# Altium PCB BUNE.PcbDoc (part 2 of 2)
Units mm, origin at the board's own origin, x right, y up, seen from the top; angles counter-clockwise.
Board outline 148 x 105 mm, 2 copper layers (Top Layer, Bottom Layer); 139 components, 96 nets, 476 pads, 94 vias.
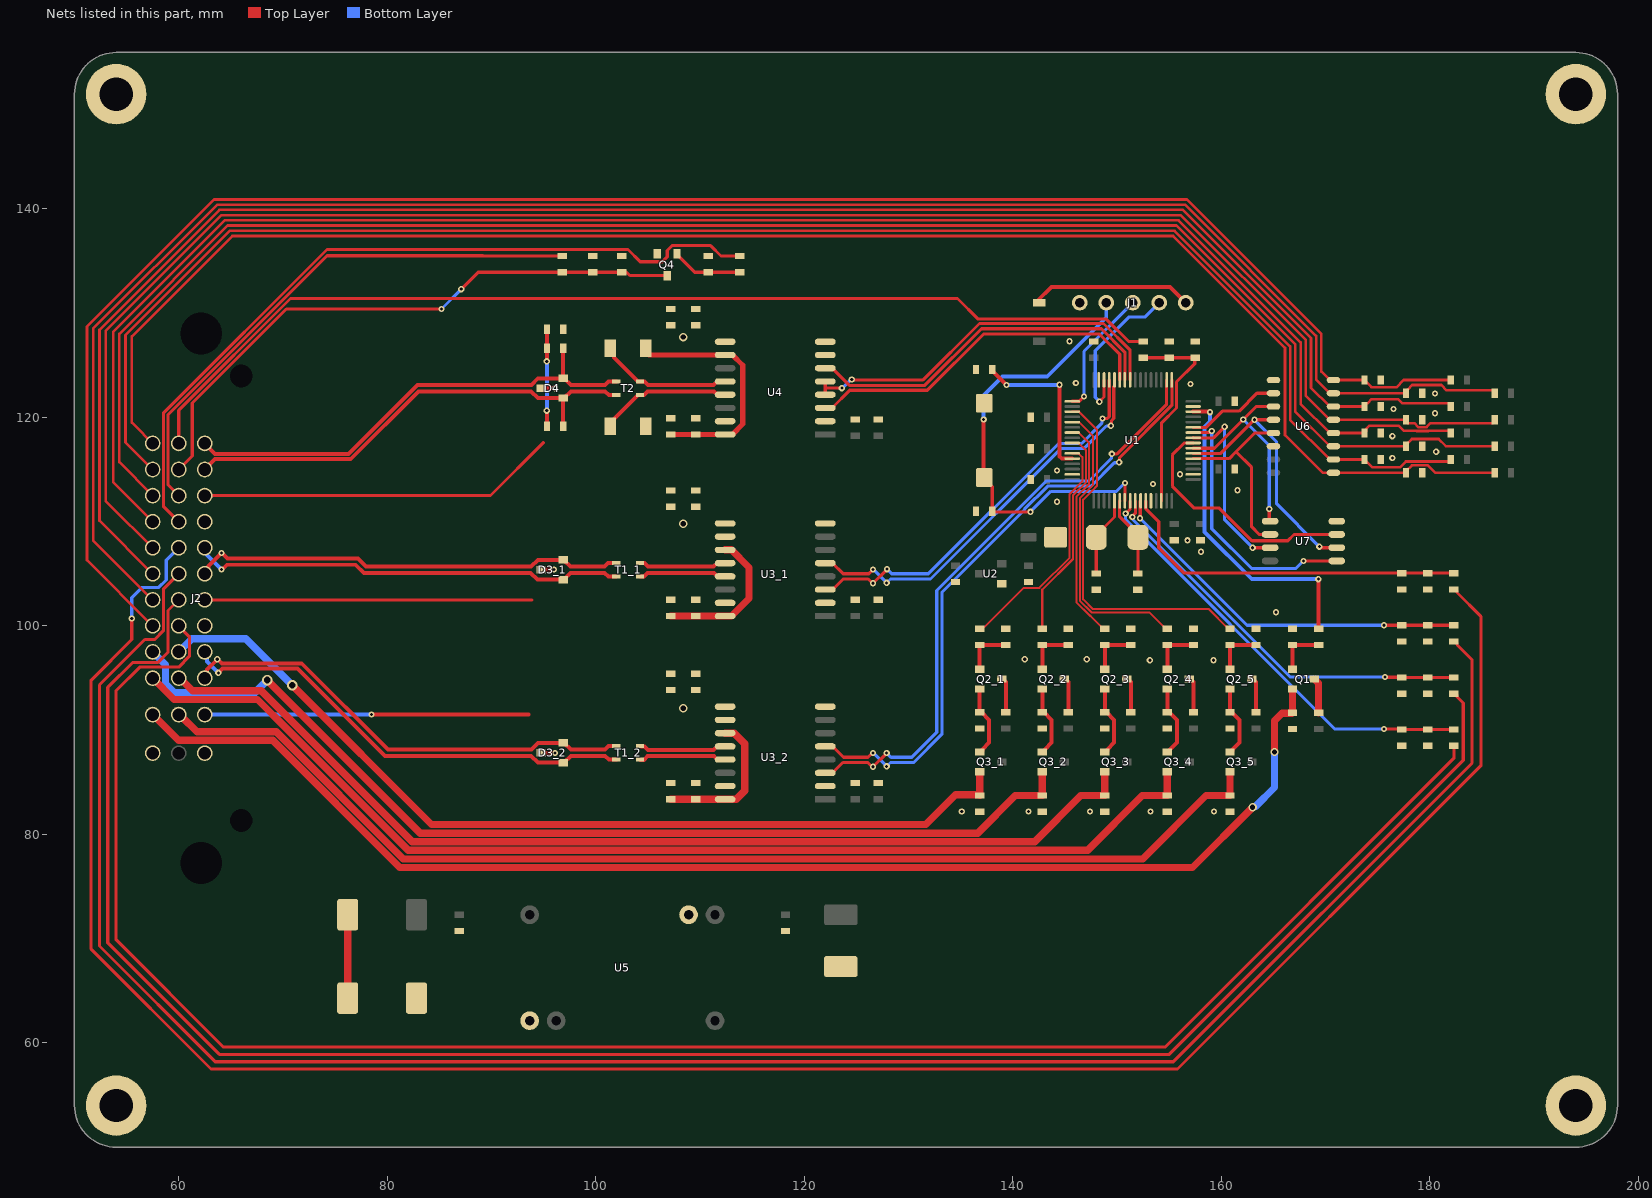
[diagram p2: the nets of this part, all layers, seen from the top]

## Via types
v1: diameter 0.6, hole 0.3, Top Layer to Bottom Layer, tented both sides, 83 vias
v2: diameter 0.8, hole 0.5, Top Layer to Bottom Layer, tented both sides, 7 vias
v3: diameter 1, hole 0.65, Top Layer to Bottom Layer, tented both sides, 4 vias

## Nets (pads, with @x,y where several pads share a name; then routed paths per layer and width w, separated by ;. In a path a pad name is that pad's centre, name@x,y a point inside that pad or via, vN(x,y) a via of type N, cw(c..) or ccw(c..) an arc to the next point about the centre after c; other vN are vias at no path point) (continued)
ACB: J2.3C R29.2 | length 52.3
  Top Layer w0.3: J2.3C@60,112.5 58.975,113.525 58.975,120.248 74.227,135.5 89.2,135.5 89.21,135.49 R29.2@96.8,135.49
BOOT: R5.1 U1.60 | length 15.3
  Top Layer w0.381: R5.1@138.03,124.593 138.03,124.443 139.373,123.1 v1(139.4,123.1) ; v1(144.47,123.13) 144.47,116.266 144.693,116.043 U1.60@145.7,116.043
  Bottom Layer w0.381: v1(139.4,123.1) 139.415,123.115 144.455,123.115 v1(144.47,123.13)
CAN_H1: D3_1.1 J2.2E T1_1.2 | length 41.8
  Top Layer w0.381: v1(64.1,105.4) 64.159,105.4 64.625,105.866 76.975,105.866 77.765,105.075 93.75,105.075 94.39,104.435 D3_1.1@96.875,104.435 ; D3_1.1@96.925,104.425 97.575,105.075 100.85,105.075 101.2,104.725 T1_1.2@101.95,104.725
  Bottom Layer w0.381: J2.2E@62.5,107.5 62.714,107.286 62.714,106.786 v1(64.1,105.4)
CAN_H2: D3_2.1 J2.2J T1_2.2 | length 44.9
  Top Layer w0.381: v1(63.8,95.5) 64.194,95.894 71.406,95.894 79.769,87.531 93.8,87.531 94.45,86.881 D3_2.1@96.875,86.881 ; D3_2.1@96.975,86.881 97.625,87.531 100.9,87.531 101.25,87.181 T1_2.2@102,87.181
  Bottom Layer w0.381: J2.2J@62.5,97.5 62.703,97.297 62.703,96.597 63.084,96.216 v1(63.8,95.5)
CAN_L1: D3_1.2 J2.2F T1_1.4 | length 41.7
  Top Layer w0.381: J2.2F@62.5,105 62.5,105.303 62.853,105.656 62.853,105.753 v1(64.1,107) 64.159,107 64.694,106.465 77.175,106.465 77.965,105.675 93.779,105.675 94.438,106.335 D3_1.2@96.875,106.335 ; D3_1.2@96.925,106.325 97.575,105.675 100.85,105.675 101.19,106.016 T1_1.4@101.94,106.016
CAN_L2: D3_2.2 J2.2K T1_2.4 | length 44.7
  Top Layer w0.381: J2.2K@62.5,95 62.714,95.214 62.714,95.814 v1(63.7,96.8) 63.733,96.8 64.133,96.4 71.8,96.4 80.069,88.131 93.829,88.131 94.479,88.781 D3_2.2@96.875,88.781 ; D3_2.2@96.975,88.781 97.625,88.131 100.9,88.131 101.24,88.472 T1_2.4@101.95,88.472
CAN_RX1: U1.44 U3_1.5 | length 39.3
  Top Layer w0.3: U3_1.5@122.01,106.02 122.71,106.02 123.73,105 126.19,105 v1(126.59,105.4) ; v1(149.4,119.2) 149.457,119.257 149.457,119.682 149.675,119.9 149.675,122.941 149.75,123.016 U1.44@149.75,123.593
  Bottom Layer w0.3: v1@126.61,105.42 v1(127.9,104.13) 128.27,104.5 132.1,104.5 144.6,117 146.8,117 148.97,119.17 149.37,119.17 v1(149.4,119.2)
CAN_RX2: U1.33 U3_2.5 | length 59.4
  Top Layer w0.3: U3_2.5@122.01,88.445 122.71,88.445 123.755,87.4 126.109,87.4 126.509,87.8 v1(126.59,87.8) ; v1(150.2,115.7) 150.231,115.731 150.231,116.13 155.25,121.149 U1.33@155.25,123.593
  Bottom Layer w0.3: v1@126.61,87.82 v1(127.9,86.53) 128.27,86.9 130.5,86.9 133.2,89.6 133.2,103.2 141.109,111.11 141.109,111.174 143.336,113.4 147.5,113.4 149.743,115.643 150.143,115.643 v1(150.2,115.7)
CAN_TX1: U1.45 U3_1.3 | length 38.6
  Top Layer w0.3: U3_1.3@122.01,103.48 122.71,103.48 123.73,104.5 126.124,104.5 126.554,104.07 126.57,104.07 v1(126.59,104.09) v1(127.942,105.442) ; v1(148.6,119.9) 149.074,119.9 149.25,120.076 U1.45@149.25,123.593
  Bottom Layer w0.3: v1(127.942,105.442) 128.383,105 131.9,105 144.4,117.5 146.6,117.5 148.543,119.443 148.543,119.843 v1(148.6,119.9)
CAN_TX2: U1.34 U3_2.3 | length 58.6
  Top Layer w0.3: U3_2.3@122.01,85.905 122.71,85.905 123.705,86.9 126.099,86.9 126.509,86.49 v1(126.59,86.49) ; v1@126.61,86.51 v1(127.9,87.8) ; v1(149.5,116.5) 150,116.5 154.75,121.25 U1.34@154.75,123.593
  Bottom Layer w0.3: v1(127.9,87.8) 128.3,87.4 130.3,87.4 132.7,89.8 132.7,103.4 143.2,113.9 147.3,113.9 149.47,116.07 149.47,116.47 v1(149.5,116.5)
DC/DC: J2.3D R30.2 | length 74.7
  Top Layer w0.3: J2.3D@60,110 58.525,111.475 58.525,120.399 74.226,136.1 103.09,136.1 104.265,134.925 106.385,134.925 106.85,135.39 106.85,136.01 107.315,136.475 111.015,136.475 112.01,135.48 R30.2@113.8,135.48
DI3.31: C38_1.2 R25_1.1 R26_1.2 U1.8 | length 41.9
  Top Layer w0.3: v1(150.82,110.783) 150.827,110.783 151.25,111.206 U1.8@151.25,111.993 ; v1(175.593,90.1) C38_1.2@177.3,90.1 ; C38_1.2@177.3,90.06 R26_1.2@179.8,90.06 R25_1.1@182.3,90.06
  Bottom Layer w0.3: v1(150.82,110.783) 150.82,110.18 170.9,90.1 v1@175.7,90.1
DI3.32: C38_2.2 R25_2.1 R26_2.2 U1.9 | length 39
  Top Layer w0.3: v1(151.466,110.453) 151.466,110.509 151.749,110.793 U1.9@151.749,111.992 ; v1(175.7,95.1) 175.72,95.08 177.28,95.08 C38_2.2@177.3,95.06 R26_2.2@179.8,95.06 R25_2.1@182.3,95.06
  Bottom Layer w0.3: v1(151.466,110.453) 151.523,110.396 151.523,110.177 166.6,95.1 v1(175.7,95.1)
DI3.33: C38_3.2 R25_3.1 R26_3.2 U1.10 | length 36.1
  Top Layer w0.3: v1(152.193,110.32) 152.227,110.354 152.227,111.97 U1.10@152.25,111.993 ; v1(175.593,100.06) C38_3.2@177.3,100.06 R26_3.2@179.8,100.06 R25_3.1@182.3,100.06
  Bottom Layer w0.3: v1(152.193,110.32) 162.453,100.06 v1(175.593,100.06)
DI3.34: C38_4.2 R25_4.1 R26_4.2 U1.11 | length 34.3
  Top Layer w0.3: U1.11@152.75,111.993 152.75,111.25 154,110 154,107.5 156.44,105.06 C38_4.2@177.3,105.06 R26_4.2@179.8,105.06 R25_4.1@182.3,105.06
DI241: J2.3H R25_1.2 | length 180.9
  Top Layer w0.3: J2.3H@60,100 61.025,98.975 61.025,97.075 60,96.05 56.25,96.05 54,93.8 54,69.9 64.3,59.6 154.596,59.6 182.3,87.304 R25_1.2@182.3,88.5
DI242: J2.3G R25_2.2 | length 190.1
  Top Layer w0.3: J2.3G@60,102.5 58.975,101.475 58.975,97.475 57.975,96.475 55.575,96.475 53.2,94.1 53.2,69.6 63.9,58.9 155,58.9 183.2,87.1 183.2,92.6 182.6,93.2 182.6,93.35 182.45,93.5 R25_2.2@182.3,93.5
DI243: J2.3F R25_3.2 | length 200
  Top Layer w0.3: J2.3F@60,105 58.525,103.525 58.525,99.525 57.7,98.7 56.751,98.7 52.4,94.349 52.4,69.3 63.5,58.2 155.4,58.2 184.043,86.843 184.043,96.757 182.6,98.2 182.6,98.35 182.45,98.5 R25_3.2@182.3,98.5
DI244: J2.3E R25_4.2 | length 211.1
  Top Layer w0.3: v1(55.5,100.7) 55.5,98.7 51.6,94.8 51.6,69 63.1,57.5 155.8,57.5 184.885,86.585 184.885,100.915 182.6,103.2 182.6,103.35 182.45,103.5 R25_4.2@182.3,103.5
  Bottom Layer w0.3: v1(55.5,100.7) 55.5,102.7 56.5,103.7 58.1,103.7 58.8,104.4 58.8,106.3 J2.3E@60,107.5
DO1: J2.3J Q3_1.2 R24_1.2 | length 88.2
  Top Layer w0.7: v3(70.9,94.3) 84.25,80.95 131.65,80.95 134.5,83.8 R24_1.2@136.825,83.8 ; R24_1.2@136.825,83.728 R24_1.2@136.825,83.8 ; Q3_1.2@136.825,85.998 R24_1.2@136.825,83.8
  Bottom Layer w0.7: J2.3J@60,97.5 61.275,98.775 66.425,98.775 v3(70.9,94.3)
DO2: J2.4J Q3_2.2 R24_2.2 | length 98.4
  Top Layer w0.7: v3(68.5,94.8) 83.175,80.125 136.625,80.125 140.228,83.728 R24_2.2@142.825,83.728 Q3_2.2@142.825,85.998
  Bottom Layer w0.7: J2.4J@57.5,97.5 58.725,96.275 58.725,94.443 59.568,93.6 67.3,93.6 v3(68.5,94.8)
DO3: J2.3K Q3_3.2 R24_3.2 | length 99.4
  Top Layer w0.7: J2.3K@60,95 60.096,95 61.321,93.775 67.925,93.775 82.4,79.3 142.1,79.3 146.528,83.728 R24_3.2@148.825,83.728 Q3_3.2@148.825,85.998
DO4: J2.4K Q3_4.2 R24_4.2 | length 108.6
  Top Layer w0.7: J2.4K@57.5,95 59.55,92.95 67.55,92.95 70.4,90.1 82.025,78.475 147.175,78.475 152.428,83.728 R24_4.2@154.825,83.728 Q3_4.2@154.825,85.998
DO5: J2.3L Q3_5.2 R24_5.2 | length 111.3
  Top Layer w0.7: J2.3L@59.993,91.347 60.253,91.347 61.75,89.85 69.35,89.85 81.55,77.65 152.45,77.65 158.528,83.728 R24_5.2@160.825,83.728 Q3_5.2@160.825,85.998
Gate1: R21_1.1 U1.59 | length 22.7
  Top Layer w0.2: R21_1.1@136.825,99.728 136.975,99.878 137.278,99.878 141.045,103.645 142.545,103.645 145.45,106.55 145.45,112.652 146.675,113.877 146.675,116.191 146.341,116.525 145.718,116.525 U1.59@145.7,116.543
Gate2: R21_2.1 U1.57 | length 20.4
  Top Layer w0.2: R21_2.1@142.825,99.728 142.825,103.465 145.775,106.416 145.775,112.517 147,113.742 147,116.866 146.341,117.525 145.718,117.525 U1.57@145.7,117.543
Gate3: R21_3.1 U1.55 | length 21.6
  Top Layer w0.2: U1.55@145.7,118.543 146.323,118.543 147.325,117.541 147.325,113.608 146.1,112.383 146.1,102.281 147.406,100.975 147.428,100.975 148.675,99.728 R21_3.1@148.825,99.728
Gate4: R21_4.1 U1.53 | length 28.4
  Top Layer w0.2: U1.53@145.7,119.543 146.338,119.543 146.365,119.516 146.384,119.516 147.7,118.2 147.7,113.523 146.425,112.248 146.425,102.675 146.425,102.415 147.54,101.3 147.8,101.3 153.103,101.3 154.675,99.728 R21_4.1@154.825,99.728
Gate5: R21_5.1 U1.51 | length 35.2
  Top Layer w0.2: U1.51@145.7,120.543 146.338,120.543 146.365,120.516 146.384,120.516 148.075,118.825 148.075,113.438 147.604,112.968 146.75,112.114 146.75,102.55 147.675,101.625 158.778,101.625 160.675,99.728 R21_5.1@160.825,99.728
GND: B1.1 C1.2 C2.2 C3.2 C4.1 C5.1 C6.1 C7.1 C8.1 C9.1 C10.1 C11.1 C12.1 C13.1 C16_1.1 C16_2.1 C17_1.1 C17_2.1 C18_1.1 C18_2.1 C21.1 C22.2 C24.2 C26.1 C27.1 C28.1 C29.1 C30.1 C31.1 C32.1 C33.1 C34.1 C35.1 C36.1 C37.1 C38_1.1 C38_2.1 C38_3.1 C38_4.1 C39.1 C40.1 D2.1 J1.1 J2.2D J2.2H J2.2M J2.4M pad.0 Q4.2 R3.1 R4.1 R5.2 R6_1.1 R6_2.1 R11.2 R22_1.1 R22_2.1 R22_3.1 R22_4.1 R22_5.1 R23_1.1 R23_2.1 R23_3.1 R23_4.1 R23_5.1 R24_1.1 R24_2.1 R24_3.1 R24_4.1 R24_5.1 R26_1.1 R26_2.1 R26_3.1 R26_4.1 R28.1 R31.1 R32.1 U1.12 U1.18 U1.31 U1.47 U1.63 U2.1 U3_1.2 U3_1.8 U3_2.2 U3_2.8 U4.2 U4.7 U4.8 U5.1 U5.10 U6.9 U6.14 U7.4
  other v1: 135.1,82.2 141.5,82.2 147.4,82.2 153.2,82.2 159.3,82.2 153.143,96.706 159.243,96.706 141.143,96.806 147.091,96.805 165.243,101.306 158.043,107.106 156.743,108.206 144.243,111.906 161.543,113.006 153.443,113.606 156.043,114.543 144.243,114.906 176.4,116.1 180.6,116.7 176.4,118.2 180.5,120.4 176.5,120.8 180.5,122.3 157.043,123.206 146.043,123.306 145.443,127.306
GND_CAN1: C14_1.1 C15_1.1 C18_1.2 D3_1.3 J2.2G R6_1.2 U3_1.9 U3_1.10 U3_1.15 | length 32.6
  Top Layer w0.3: J2.2G@62.5,102.5 93.9,102.5
  Top Layer w0.381: D3_1.3@94.775,105.385 94.783,105.392 95.992,105.392 v1(96,105.4)
  other v2: 108.4,109.8
GND_CAN2: C14_2.1 C15_2.1 C18_2.2 D3_2.3 J2.2L R6_2.2 U3_2.9 U3_2.10 U3_2.15 | length 32.4
  Top Layer w0.381: v1(78.5,91.5) 93.555,91.5 ; D3_2.3@94.775,87.831 94.791,87.816 96.084,87.816 v1(96.1,87.8)
  Bottom Layer w0.381: J2.2L@62.5,91.5 v1(78.5,91.5)
  other v2: 108.4,92.1
GND_RS485: C19.2 C20.2 C23.2 C24.1 D4.3 J2.2C R7.2 R11.1 U4.9 U4.15 | length 35.9
  Top Layer w0.3: J2.2C@62.5,112.5 89.9,112.5 95,117.6
  Top Layer w0.381: D4.3@94.775,122.8 v1(96.1,122.8)
  other v2: 108.4,127.7
IGBT_Gate: R2.1 U1.30 | length 30.9
  Top Layer w0.381: U1.30@157.3,120.543 158.798,120.543 158.841,120.5 v1(158.9,120.5) ; v1(169.3,104.485) 169.312,104.472 169.312,99.74 R2.1@169.325,99.728
  Bottom Layer w0.381: v1(158.9,120.5) 158.9,119.6 158.4,119.1 158.4,109 162.915,104.485 v1(169.3,104.485)
IGBT_Gates: J2.4L Q1.2 R4.2 | length 127.2
  Top Layer w0.7: J2.4L@57.5,91.5 59.975,89.025 69.008,89.025 81.208,76.825 157.225,76.825 v2(163,82.6) ; v2(165.1,87.9) 165.1,90.9 165.817,91.618 166.775,91.618 R4.2@166.825,91.668 Q1.2@166.825,93.948
  Bottom Layer w0.7: v2@163.3,82.7 165.1,84.5 v2(165.1,87.9)
MISO: U1.22 U6.12 U7.2 | length 25.5
  Top Layer w0.3: U1.22@157.3,116.543 159.943,116.543 v1(163.17,119.77) U6.12@165,119.77 ; v1(169.4,107.6) 169.481,107.6 169.581,107.5 U7.2@171.075,107.5
  Bottom Layer w0.3: v1(163.17,119.77) 165.3,117.64 165.3,111.7 v1(169.4,107.6)
MOSI: U1.23 U6.11 U7.5 | length 20.2
  Top Layer w0.3: U1.23@157.3,117.043 159.343,117.043 v1(162.1,119.8) 163.34,121.04 U6.11@165,121.04 ; v1(164.6,111.2) 164.6,110.115 U7.5@164.675,110.04
  Bottom Layer w0.3: v1(162.1,119.8) 164.6,117.3 v1(164.6,111.2)
NetC1_1: C1.1 U1.5 Y1.2 | length 7.7
  Top Layer w0.3: C1.1@148,105.03 Y1.2@148,108.5 ; Y1.2@148,108.7 149.75,110.45 U1.5@149.75,111.993
  Top Layer w0.381: Y1.2@148,108.5 Y1.2@148,108.7
NetC2_1: C2.1 U1.6 Y1.1 | length 7.7
  Top Layer w0.3: U1.6@150.25,111.993 150.245,111.988 150.245,110.455 152,108.7 Y1.1@152,108.5 C2.1@152,105.03
NetC23_1: C23.1 R8.1 R9.2 | length 9.3
  Top Layer w0.381: R8.1@95.315,119.145 v1@95.315,120.685 ; v1@95.315,125.415 R9.2@95.315,126.625 C23.1@95.315,128.45
  Bottom Layer w0.381: v1(95.301,120.643) v1(95.301,125.373)
NetC25_1: C25.1 C29.2 | length 8
  Top Layer w0.7: C29.2@76.2,64.3 C25.1@76.2,72.3
NetC39_2: C39.2 R27.1 R28.2 U1.14 | length 20.1
  Top Layer w0.3: R27.1@152.27,125.72 R28.2@155,125.72 C39.2@157.267,125.72 ; U1.14@154.25,111.993 154.25,119.45 155.7,120.9 155.7,123.4 157.446,125.146 157.446,125.666 C39.2@157.5,125.72
NetD1_1: D1.1 J1.5 | length 15.4
  Top Layer w0.381: D1.1@142.384,131.184 143.7,132.5 155.08,132.5 J1.5@156.58,131
NetQ1_1: Q1.1 R2.2 R3.2 | length 4.8
  Top Layer w0.381: Q1.1@166.825,95.848 R3.2@166.825,98.168 R2.2@169.325,98.168
NetQ1_3: Q1.3 R1.1 | length 3.4
  Top Layer w0.7: Q1.3@168.925,94.898 169.325,94.498 R1.1@169.325,91.668
NetQ2_1_1: Q2_1.1 R21_1.2 R22_1.2 | length 4.8
  Top Layer w0.381: Q2_1.1@136.825,95.848 R21_1.2@136.825,98.168 R22_1.2@139.325,98.168
NetQ2_1_2: Q2_1.2 Q3_1.1 R23_1.2 | length 6.9
  Top Layer w0.381: Q3_1.1@136.825,87.898 136.925,87.898 137.085,88.057 137.085,88.157 137.725,88.798 137.725,90.978 136.975,91.728 R23_1.2@136.825,91.728 Q2_1.2@136.825,93.948
NetQ2_1_3: Q2_1.3 R20_1.1 | length 3.4
  Top Layer w0.381: Q2_1.3@138.925,94.898 139.025,94.898 139.325,94.598 R20_1.1@139.325,91.728
NetQ2_2_1: Q2_2.1 R21_2.2 R22_2.2 | length 4.8
  Top Layer w0.381: Q2_2.1@142.825,95.848 R21_2.2@142.825,98.168 R22_2.2@145.325,98.168
NetQ2_2_2: Q2_2.2 Q3_2.1 R23_2.2 | length 6.9
  Top Layer w0.381: Q3_2.1@142.825,87.898 142.925,87.898 143.085,88.057 143.085,88.157 143.725,88.798 143.725,90.978 142.975,91.728 R23_2.2@142.825,91.728 Q2_2.2@142.825,93.948
NetQ2_2_3: Q2_2.3 R20_2.1 | length 3.4
  Top Layer w0.381: Q2_2.3@144.925,94.898 145.025,94.898 145.325,94.598 R20_2.1@145.325,91.728
NetQ2_3_1: Q2_3.1 R21_3.2 R22_3.2 | length 4.8
  Top Layer w0.381: Q2_3.1@148.825,95.848 R21_3.2@148.825,98.168 R22_3.2@151.325,98.168
NetQ2_3_2: Q2_3.2 Q3_3.1 R23_3.2 | length 6.9
  Top Layer w0.381: Q3_3.1@148.825,87.898 148.925,87.898 149.085,88.057 149.085,88.157 149.725,88.798 149.725,90.978 148.975,91.728 R23_3.2@148.825,91.728 Q2_3.2@148.825,93.948
NetQ2_3_3: Q2_3.3 R20_3.1 | length 3.4
  Top Layer w0.381: Q2_3.3@150.925,94.898 151.025,94.898 151.325,94.598 R20_3.1@151.325,91.728
NetQ2_4_1: Q2_4.1 R21_4.2 R22_4.2 | length 4.8
  Top Layer w0.381: Q2_4.1@154.825,95.848 R21_4.2@154.825,98.168 R22_4.2@157.325,98.168
NetQ2_4_2: Q2_4.2 Q3_4.1 R23_4.2 | length 6.9
  Top Layer w0.381: Q3_4.1@154.825,87.898 154.925,87.898 155.085,88.057 155.085,88.157 155.725,88.798 155.725,90.978 154.975,91.728 R23_4.2@154.825,91.728 Q2_4.2@154.825,93.948
NetQ2_4_3: Q2_4.3 R20_4.1 | length 3.4
  Top Layer w0.381: Q2_4.3@156.925,94.898 157.025,94.898 157.325,94.598 R20_4.1@157.325,91.728
NetQ2_5_1: Q2_5.1 R21_5.2 R22_5.2 | length 4.8
  Top Layer w0.381: Q2_5.1@160.825,95.848 R21_5.2@160.825,98.168 R22_5.2@163.325,98.168
NetQ2_5_2: Q2_5.2 Q3_5.1 R23_5.2 | length 6.9
  Top Layer w0.381: Q3_5.1@160.825,87.898 160.925,87.898 161.085,88.057 161.085,88.157 161.725,88.798 161.725,90.978 160.975,91.728 R23_5.2@160.825,91.728 Q2_5.2@160.825,93.948
NetQ2_5_3: Q2_5.3 R20_5.1 | length 3.4
  Top Layer w0.381: Q2_5.3@162.925,94.898 163.025,94.898 163.325,94.598 R20_5.1@163.325,91.728
NetQ4_1: Q4.1 R30.1 R32.2 | length 6.7
  Top Layer w0.3: Q4.1@107.8,135.6 109.48,133.92 R32.2@110.8,133.92 R30.1@113.8,133.92
NetR7_1: R7.1 T2.1 U4.13 | length 12.7
  Top Layer w0.381: R7.1@101.4,119.145 101.76,119.505 101.76,119.85 104.05,122.14 T2.1@104.25,122.14 ; T2.1@104.3,122.15 104.31,122.159 104.635,122.159 104.975,122.5 111.326,122.5 111.651,122.175 U4.13@112.41,122.175
NetR10_2: R10.2 T2.3 U4.12 | length 12.9
  Top Layer w0.381: R10.2@101.4,126.625 101.76,126.265 101.76,125.731 104.05,123.44 T2.3@104.25,123.44 ; T2.3@104.3,123.45 104.31,123.44 104.66,123.44 105,123.1 111.306,123.1 111.651,123.445 U4.12@112.41,123.445
NetT1_1_1: T1_1.1 U3_1.13 | length 8.4
  Top Layer w0.381: T1_1.1@104.3,104.725 104.31,104.734 104.635,104.734 104.975,105.075 111.326,105.075 111.651,104.75 U3_1.13@112.41,104.75
NetT1_1_3: T1_1.3 U3_1.12 | length 8.4
  Top Layer w0.381: T1_1.3@104.3,106.025 104.31,106.015 104.66,106.015 105,105.675 111.306,105.675 111.651,106.02 U3_1.12@112.41,106.02
NetT1_2_1: T1_2.1 U3_2.13 | length 8.4
  Top Layer w0.381: T1_2.1@104.3,87.15 104.31,87.159 104.635,87.159 104.975,87.5 111.326,87.5 111.651,87.175 U3_2.13@112.41,87.175
NetT1_2_3: T1_2.3 U3_2.12 | length 8.4
  Top Layer w0.381: T1_2.3@104.3,88.45 104.31,88.44 104.66,88.44 105,88.1 111.306,88.1 111.651,88.445 U3_2.12@112.41,88.445
NetU1_24: U1.24 U7.3 | length 23.7
  Top Layer w0.3: U1.24@157.3,117.543 156.443,117.543 155.3,116.4 155.3,113.4 157.4,111.3 159.8,111.3 162.93,108.17 166.37,108.17 166.97,108.77 U7.3@171.075,108.77
NetU1_25: U1.25 U7.7 | length 17.9
  Top Layer w0.3: U1.25@157.3,118.043 157.304,118.039 159.255,118.039 v1(160.316,119.1) ; v1@162.9,107.5 v1(163,107.5) U7.7@164.675,107.5
  Bottom Layer w0.3: v1(160.316,119.1) 160.316,110.184 v1(163,107.5)
NetU1_41: U1.41 U4.4 U4.5 | length 36.9
  Top Layer w0.3: U4.4@122.01,122.175 U4.5@122.01,123.445 ; 122.11,122.8 v1(123.6,122.8) ; v1(124.557,123.643) 124.77,123.643 124.812,123.6 131.4,123.6 136.8,129 148.7,129 151.25,126.45 U1.41@151.25,123.593
  Bottom Layer w0.3: v1(123.6,122.8) 123.657,122.8 124.5,123.643 v1(124.557,123.643)
NetU1_42: U1.42 U4.6 | length 35.3
  Top Layer w0.3: U4.6@122.01,124.715 122.672,124.715 124.319,123.068 131.568,123.068 137,128.5 148.5,128.5 150.75,126.25 U1.42@150.75,123.593
NetU1_43: U1.43 U4.3 | length 34.4
  Top Layer w0.3: U4.3@122.01,120.905 122.653,120.905 124.348,122.6 131.8,122.6 137.2,128 148.3,128 150.25,126.05 U1.43@150.25,123.593
NRST: B1.2 C3.1 J1.2 U1.7 | length 43.3
  Top Layer w0.3: B1.2@137.25,114.23 137.25,114.13 138.03,113.35 C3.1@138.03,110.993 138.087,110.936 v1(141.684,110.936) ; U1.7@150.75,111.993 v1(150.75,113.7)
  Top Layer w0.381: v1(137.2,119.8) 137.2,114.28 B1.2@137.25,114.23
  Bottom Layer w0.3: v1(141.684,110.936) 143.649,112.9 149.95,112.9 v1(150.75,113.7)
  Bottom Layer w0.381: v1(137.2,119.8) 137.2,122.1 139,123.9 143.3,123.9 148.96,129.56 J1.2@148.96,131
RS485_A: D4.2 J2.2A R9.1 T2.4 | length 46.2
  Top Layer w0.381: J2.2A@62.5,117.5 63.494,116.506 76.29,116.506 82.884,123.1 93.829,123.1 94.479,123.75 D4.2@96.875,123.75 ; R9.1@96.875,126.625 D4.2@96.875,123.75 ; T2.4@102,123.45 101.991,123.44 101.24,123.44 100.9,123.1 97.625,123.1 96.975,123.75 D4.2@96.875,123.75
RS485_B: D4.1 J2.2B R8.2 T2.2 | length 46
  Top Layer w0.381: J2.2B@62.5,115 63.5,116 76.5,116 83,122.5 93.8,122.5 94.45,121.85 D4.1@96.875,121.85 ; R8.2@96.875,119.145 D4.1@96.875,121.85 ; T2.2@102,122.15 101.25,122.15 100.9,122.5 97.625,122.5 96.975,121.85 D4.1@96.875,121.85
SCK: U1.21 U6.13 U7.6 | length 18.6
  Top Layer w0.3: U1.21@157.3,116.043 160.743,116.043 161.4,116.7 ; U7.6@164.675,108.77 163.63,108.77 162.9,109.5 162.9,115.2 161.4,116.7 ; U6.13@165,118.5 163.2,118.5 161.4,116.7
SS1: U1.27 U6.10 | length 9.1
  Top Layer w0.3: U1.27@157.3,119.043 158.543,119.043 160.1,120.6 161.7,120.6 163.41,122.31 U6.10@165,122.31
SS2: U1.26 U7.1 | length 25.1
  Top Layer w0.3: U1.26@157.3,118.543 158.846,118.543 159.003,118.7 v1(159.085,118.7) ; v1(167.87,106.23) U7.1@171.075,106.23
  Bottom Layer w0.3: v1(159.085,118.7) 159.085,109.315 162.9,105.5 167.14,105.5 v1(167.87,106.23)
SWCLK: J1.3 U1.49 | length 12.3
  Top Layer w0.3: U1.49@145.7,121.543 146.376,121.543 v1(146.829,121.995)
  Bottom Layer w0.3: v1(146.829,121.995) 146.829,126.329 J1.3@151.5,131
SWDIO: J1.4 U1.46 | length 15.4
  Top Layer w0.3: v1(148.3,121.5) 148.75,121.95 U1.46@148.75,123.593
  Bottom Layer w0.3: v1(148.3,121.5) 148.3,121.526 147.9,121.926 147.9,126.4 151.118,129.618 152.658,129.618 J1.4@154.04,131
SWITCH: C40.2 J2.3B Q4.3 R29.1 R31.2 | length 57.8
  Top Layer w0.3: J2.3B@60,115 61.3,116.3 61.3,121.371 70.329,130.4 v1(85.2,130.4) ; v1(87.1,132.3) 88.72,133.92 R29.1@96.8,133.92 102.95,133.92 103.27,133.6 Q4.3@106.85,133.6
  Bottom Layer w0.3: v1(85.2,130.4) v1(87.1,132.3)
TEMP1: C30.2 J2.4A R12.1 U6.1 | length 161.1
  Top Layer w0.25: J2.4A@57.742,117.258 55.5,119.5 55.5,127.754 65.146,137.4 155.37,137.4 166.1,126.67 166.1,118.3 169.71,114.69 U6.1@170.75,114.69 C30.2@177.72,114.69 177.72,114.84 178.27,115.39 179.81,115.39 180.51,114.69 R12.1@186.22,114.69
TEMP2: C31.2 J2.4B R13.1 U6.2 | length 159.1
  Top Layer w0.25: J2.4B@57.5,115 54.9,117.6 54.9,127.9 64.888,137.888 155.512,137.888 166.6,126.8 166.6,119.76 170.4,115.96 U6.2@170.75,115.96 C31.2@173.72,115.96 174.48,115.2 177.126,115.2 177.691,115.765 181.825,115.765 182,115.94 R13.1@182,115.96
TEMP3: C32.2 J2.4C R14.1 U6.3 | length 166.3
  Top Layer w0.25: J2.4C@57.5,112.5 54.3,115.7 54.3,128 64.7,138.4 155.7,138.4 167.1,127 167.1,120.53 170.4,117.23 U6.3@170.75,117.23 C32.2@177.72,117.23 177.72,117.38 177.895,117.555 178.27,117.93 180.839,117.93 181.539,117.23 R14.1@186.22,117.23
TEMP4: C33.2 J2.4D R15.1 U6.4 | length 165.6
  Top Layer w0.25: J2.4D@57.809,109.691 53.704,113.796 53.704,128.204 64.4,138.9 155.9,138.9 167.6,127.2 167.6,121.3 170.4,118.5 U6.4@170.75,118.5 C33.2@173.72,118.5 173.895,118.675 173.895,118.885 174.21,119.2 177,119.2 177.5,118.7 178.716,118.7 178.721,118.695 179.839,118.695 179.844,118.7 181.825,118.7 182,118.525 R15.1@182,118.5
TEMP5: C34.2 J2.4E R16.1 U6.5 | length 173.1
  Top Layer w0.25: J2.4E@57.91,107.09 53,112 53,128.3 64.1,139.4 156.1,139.4 168.1,127.4 168.1,122.07 170.4,119.77 U6.5@170.75,119.77 C34.2@177.72,119.77 177.72,119.62 177.895,119.445 178.501,119.445 178.876,119.07 179.684,119.07 180.059,119.445 186.045,119.445 186.22,119.62 R16.1@186.22,119.77
TEMP6: C35.2 J2.4F R17.1 U6.6 | length 171.3
  Top Layer w0.25: J2.4F@57.555,104.945 52.4,110.1 52.4,128.4 63.9,139.9 156.3,139.9 168.6,127.6 168.6,122.84 170.4,121.04 C35.2@173.72,121.04 173.72,121.19 173.895,121.365 174.045,121.365 174.42,121.74 176.96,121.74 177.335,121.365 181.825,121.365 182,121.19 R17.1@182,121.04
TEMP7: C36.2 J2.4G R18.1 U6.7 | length 178.5
  Top Layer w0.25: J2.4G@57.5,102.5 51.8,108.2 51.8,128.5 63.7,140.4 156.5,140.4 169.1,127.8 169.1,123.61 170.4,122.31 U6.7@170.75,122.31 C36.2@177.72,122.31 177.895,122.485 177.895,122.695 178.3,123.1 181.1,123.1 181.6,122.6 186.045,122.6 186.22,122.425 R18.1@186.22,122.31
TEMP8: C37.2 J2.4H R19.1 U6.8 | length 177
  Top Layer w0.25: J2.4H@57.5,100 51.2,106.3 51.2,128.7 63.4,140.9 156.7,140.9 169.6,128 169.6,124.38 170.4,123.58 U6.8@170.75,123.58 C37.2@173.72,123.58 174.4,122.9 174.856,122.9 174.876,122.88 176.78,122.88 177.48,123.58 R19.1@182,123.58
Viso: C19.1 C20.1 R10.1 U4.10 U4.16 | length 23.1
  Top Layer w0.5: R10.1@104.8,126.625 104.8,126.325 105.14,125.985 U4.10@112.41,125.985 113.11,125.985 114.1,124.995 114.1,119.355 113.11,118.365 U4.16@112.41,118.365 C19.1@109.6,118.365 C20.1@107.2,118.365
Viso_1: C14_1.2 C15_1.2 U3_1.11 U3_1.16 | length 14.2
  Top Layer w0.7: C15_1.2@107.2,100.94 C14_1.2@109.6,100.94 U3_1.16@112.41,100.94 113.01,100.94 114.7,102.63 114.7,105.6 113.01,107.29 U3_1.11@112.41,107.29
Viso_2: C14_2.2 C15_2.2 U3_2.11 U3_2.16 | length 14.3
  Top Layer w0.7: C15_2.2@107.2,83.365 C14_2.2@109.6,83.365 113.465,83.365 114.3,84.2 114.3,88.7 113.285,89.715 U3_2.11@112.41,89.715
VS_Signal: J2.3A R27.2 | length 101.8
  Top Layer w0.3: J2.3A@60,117.5 60,120.672 70.728,131.4 134.7,131.4 136.675,129.425 148.975,129.425 151.12,127.28 R27.2@152.5,127.28
pads on no net: J2.4 J2.5 J2.6 J2.7 U1.1 U1.2 U1.3 U1.4 U1.15 U1.16 U1.17 U1.20 U1.28 U1.29 U1.35 U1.36 U1.37 U1.38 U1.39 U1.40 U1.50 U1.52 U1.54 U1.56 U1.58 U1.61 U1.62 U3_1. U3_1.4 U3_1.6 U3_1.7 U3_1.14 U3_2. U3_2.4 U3_2.6 U3_2.7 U3_2.14 U4. U4.11 U4.14 U5.2 U5.8

## Polygon pours and split planes (outlines as drawn)
GND on Bottom Layer "GND_L02_P018" (solid, pour order 18): 50,54 50,151 cw(c54,151) 54,155 194,155 cw(c194,151) 198,151 198,54 cw(c194,54) 194,50 54,50 cw(c54,54)
GND_CAN2 on Bottom Layer "NONET_L-01_P-001" (solid, pour order 17): 117.2,83.225 117.2,92.725 115.3,94.625 95.1,94.625 93.2,92.725 93.2,83.225 95.3,81.125 115.1,81.125
GND_RS485 on Bottom Layer "NONET_L-01_P-001" (solid, pour order 12): 117.2,118.225 117.2,127.725 115.3,129.625 95.1,129.625 93.2,127.725 93.2,118.225 95.3,116.125 115.1,116.125
GND_CAN1 on Bottom Layer "NONET_L-01_P-001" (solid, pour order 16): 117.2,100.8 117.2,110.3 115.3,112.2 95.1,112.2 93.2,110.3 93.2,100.8 95.3,98.7 115.1,98.7
GND on Top Layer "GND_L01_P015" (solid, pour order 15): 50,54 50,151 cw(c54,151) 54,155 194,155 cw(c194,151) 198,151 198,54 cw(c194,54) 194,50 54,50 cw(c54,54)
GND_CAN2 on Top Layer "NONET_L-01_P-001" (solid, pour order 14): 117.2,83.225 117.2,92.725 115.3,94.625 95.1,94.625 93.2,92.725 93.2,83.225 95.3,81.125 115.1,81.125
GND_RS485 on Top Layer "NONET_L-01_P-001" (solid, pour order 11): 117.2,118.225 117.2,127.725 115.3,129.625 95.1,129.625 93.2,127.725 93.2,118.225 95.3,116.125 115.1,116.125
GND_CAN1 on Top Layer "NONET_L-01_P-001" (solid, pour order 13): 117.2,100.8 117.2,110.3 115.3,112.2 95.1,112.2 93.2,110.3 93.2,100.8 95.3,98.7 115.1,98.7

## Silkscreen, mask and mechanical layers (free items; w line width, h text height)
Top Overlay:
  text "GND" at 147,133.8 h1 r90
  text "NRST" at 149.3,133.7 h1 r90
  text "SWCLK" at 151.8,133.6 h1 r90
  text "SWDIO" at 154.6,133.6 h1 r90
  text "+3,3v" at 157.067,133.5 h1 r90
  text "RS485" at 114,115 h1.5
  text "CAN1" at 114.9,97.9 h1.5
  text "CAN2" at 114.7,80.2 h1.5
  text "ЦПТ ТМХ / БУНЭ / Версия 1" at 138.262,58.2 h7
Mechanical 1:
  the board outline again, w0.254